# Altium PCB PCB1.PcbDoc
Units mil, origin at the board's own origin, x right, y up, seen from the top; angles counter-clockwise.
Board outline 7215 x 5000 mil, 2 copper layers (Top Layer, Bottom Layer); 106 components, 54 nets, 376 pads, 0 vias.
Unrouted connection lines stored in the file: 265.
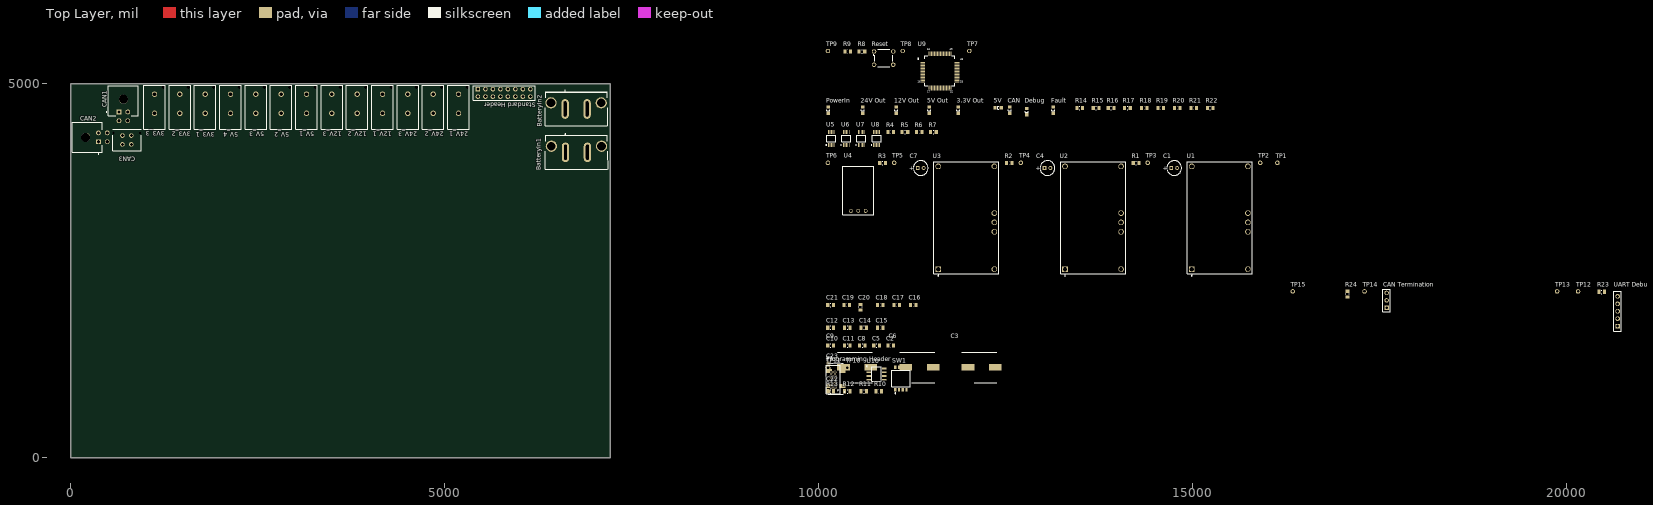
[diagram p0: Top Layer view]
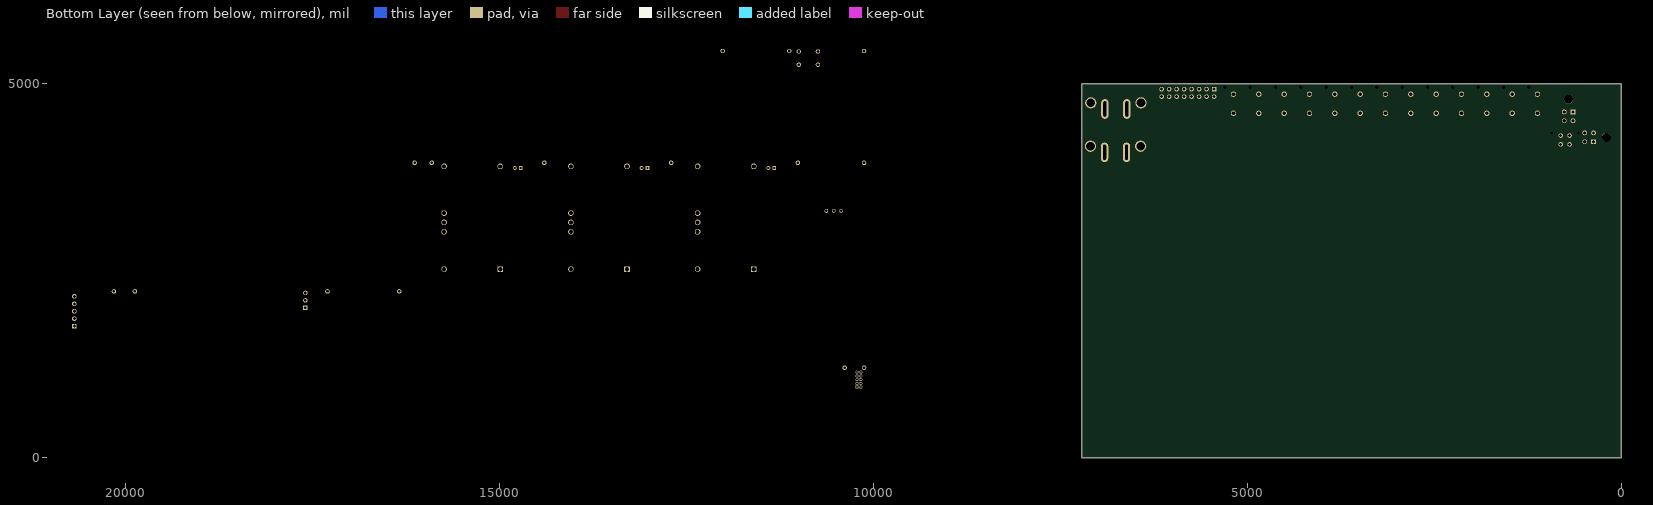
[diagram p1: Bottom Layer view, seen from below]

## Layer stack, top to bottom
Top Solder: solder mask 0.4, Solder Resist, Dk 3.5
Top Layer: signal copper 1.4
Dielectric 1: dielectric 12.6, FR-4, Dk 4.8
Bottom Layer: signal copper 1.4
Bottom Solder: solder mask 0.4, Solder Resist, Dk 3.5

## Board outline
0,0 7215,0 7215,5000 0,5000

## Design rules (kind name [scope] priority, off if disabled: settings)
Clearance [All] p1: gap=10 ignorepadtopadclearanceinfootprint=FALSE except(0: Arc-Hole Track-Hole SMDPad-Hole THPad-Hole Via-Hole Fill-Hole Poly-Hole Region-Hole Text-Hole)
PolygonConnect [All] p1: connectstyle=Relief reliefconductorwidth=10 reliefentries=4 polygonreliefangle="90 Angle" airgapwidth=10
RoutingVias [All] p1: holewidth=28 width=50 viastyle="Through Hole" minholewidth=28 minwidth=50 maxholewidth=28 maxwidth=50
SolderMaskExpansion [All] p1: expansion=4 istentingtop=FALSE
Width [All] p1: maxlimit=10 minlimit=10 preferedwidth=10
30 further rules are at their usual default settings.

## Classes and differential pairs
component class Microcontroller: C16 C17 C18 C19 C20 C21 R8 R9 Reset TP7 TP8 TP9 U9 Y1
component class LEDs: "3.3V Out" 5V "5V Out" "12V Out" "24V Out" CAN Debug Fault PowerIn R14 R15 R16 R17 R18 R19 R20 R21 R22
component class "Current Sensors": C12 C13 C14 C15 R4 R5 R6 R7 U5 U6 U7 U8
component class Converters: C1 C2 C3 C4 C5 C6 C7 C8 C9 C10 C11 R1 R2 R3 TP1 TP2 TP3 TP4 TP5 TP6 U1 U2 U3 U4
component class Connectors: 3V3_1 3V3_2 3V3_3 5V_1 5V_2 5V_3 5V_4 12V_1 12V_2 12V_3 24V_1 24V_2 24V_3 BatteryIn1 BatteryIn2 C23 CAN1 CAN2 CAN3 "CAN Termination" "Programming Header" R23 R24 "Standard Header" TP12 TP13 TP14 TP15 "UART Debug"
component class CAN: C22 R10 R11 R12 R13 SW1 TP10 TP11 U10

## Components (designator, comment, footprint, x,y, rotation, side; value= is the part's Value field where it differs from the comment)
"3.3V Out" "Yellow LED" 0805_A 11870,4650 r90 top
3V3_1 "Molex 6.5MM  power connector" "power connector" 1616.79,4374.37 r0 top
3V3_2 "Molex 6.5MM  power connector" "power connector" 1278.04,4374.37 r0 top
3V3_3 "Molex 6.5MM  power connector" "power connector" 939.29,4374.37 r0 top
5V "Yellow LED" 0805_A 12400,4680 r0 top
"5V Out" "Yellow LED" 0805_A 11480,4650 r90 top
5V_1 "Molex 6.5MM  power connector" "power connector" 2971.79,4374.37 r0 top
5V_2 "Molex 6.5MM  power connector" "power connector" 2633.04,4374.37 r0 top
5V_3 "Molex 6.5MM  power connector" "power connector" 2294.29,4374.37 r0 top
5V_4 "Molex 6.5MM  power connector" "power connector" 1955.54,4374.37 r0 top
"12V Out" "Yellow LED" 0805_A 11040,4650 r90 top
12V_1 "Molex 6.5MM  power connector" "power connector" 3988.04,4374.37 r0 top
12V_2 "Molex 6.5MM  power connector" "power connector" 3649.29,4374.37 r0 top
12V_3 "Molex 6.5MM  power connector" "power connector" 3310.54,4374.37 r0 top
"24V Out" "Yellow LED" 0805_A 10590,4650 r90 top
24V_1 "Molex 6.5MM  power connector" "power connector" 5004.29,4374.37 r0 top
24V_2 "Molex 6.5MM  power connector" "power connector" 4665.54,4374.37 r0 top
24V_3 "Molex 6.5MM  power connector" "power connector" 4326.79,4374.37 r0 top
BatteryIn1 "Super Saber" "Super Sabre" 7168.55,4284.71 r180 top
BatteryIn2 "Super Saber" "Super Sabre" 7163.55,4864.71 r180 top
C1 "ECA1HM100" CAPPR55-200-1100X500X1200 14755,3875 r0 top
C2 "Capacitor 0805" "Cap 0805" 10965,1500 r0 top
C3 "Motor Capacitor SMD" CAP_SMD_CAN 12180,1210 r0 top
C4 "ECA1HM100" CAPPR55-200-1100X500X1200 13060,3875 r0 top
C5 "Capacitor 0805" "Cap 0805" 10775,1500 r0 top
C6 "Motor Capacitor SMD" CAP_SMD_CAN 11350,1210 r0 top
C7 "ECA1HM100" CAPPR55-200-1100X500X1200 11365,3875 r0 top
C8 "Capacitor 0805" "Cap 0805" 10585,1500 r0 top
C9 "Motor Capacitor SMD" CAP_SMD_CAN 10515,1210 r0 top
C10 "Capacitor 0805" "Cap 0805" 10160,1500 r0 top
C11 "Capacitor 0805" "Cap 0805" 10385,1500 r0 top
C12 "Capacitor 0805" "Cap 0805" 10160,1740 r0 top
C13 "Capacitor 0805" "Cap 0805" 10385,1740 r0 top
C14 "Capacitor 0805" "Cap 0805" 10605,1740 r0 top
C15 "Capacitor 0805" "Cap 0805" 10825,1740 r0 top
C16 "Capacitor 0805" "Cap 0805" 11265,2045 r0 top
C17 "Capacitor 0805" "Cap 0805" 11045,2045 r0 top
C18 "Capacitor 0805" "Cap 0805" 10825,2045 r0 top
C19 "Capacitor 0805" "Cap 0805" 10375,2045 r0 top
C20 "Capacitor 0805" "Cap 0805" 10560,2015 r90 top
C21 "Capacitor 0805" "Cap 0805" 10160,2045 r0 top
C22 "Capacitor 0805" "Cap 0805" 10130,925 r90 top
C23 "Capacitor 0805" "Cap 0805" 10130,1230 r90 top
CAN "Blue LED" 0805_A 12555,4650 r90 top
CAN1 "Molex Micro" "MICROFIT R/A 4 PIN" 906.06,4980.08 r180 top
CAN2 "Molex Micro" "MICROFIT R/A 4 PIN" 14.92,4487.94 r270 top
CAN3 "Molex Micro" "microfit 4 pin" 750,4250 r180 top
"CAN Termination" "Header 3" HDR1X3 17595,2005 r90 top
Debug "Green LED" 0805_A 12785,4630 r90 top
Fault "Red LED" 0805_A 13135,4650 r90 top
PowerIn "Yellow LED" 0805_A 10130,4650 r90 top
"Programming Header" "Programming Header" programming3D 10310,850 r90 top
R1 "Resistor 0805" RESC0805(2012)_N 14245,3940 r0 top value="732 Ohm"
R2 "Resistor 0805" RESC0805(2012)_N 12550,3940 r0 top value="21 kOhm"
R3 "Resistor 0805" RESC0805(2012)_N 10855,3940 r0 top value="78.7 kOhm"
R4 "Resistor 0805" RESC0805(2012)_N 10965,4355 r0 top value="2 mOhm"
R5 "Resistor 0805" RESC0805(2012)_N 11155,4355 r0 top value="2 mOhm"
R6 "Resistor 0805" RESC0805(2012)_N 11345,4355 r0 top value="2 mOhm"
R7 "Resistor 0805" RESC0805(2012)_N 11535,4355 r0 top value="2 mOhm"
R8 "Resistor 0805" RESC0805(2012)_N 10580,5435 r0 top value="4.7 kOhm"
R9 "Resistor 0805" RESC0805(2012)_N 10390,5435 r0 top value="4.7 kOhm"
R10 "Resistor 0805" RESC0805(2012)_N 10805,890 r0 top value=120R
R11 "Resistor 0805" RESC0805(2012)_N 10605,890 r0 top value=120R
R12 "Resistor 0805" RESC0805(2012)_N 10385,890 r0 top value=120R
R13 "Resistor 0805" RESC0805(2012)_N 10160,890 r0 top value=120R
R14 "Resistor 0805" RESC0805(2012)_N 13490,4680 r0 top value="2.2 kOhm"
R15 "Resistor 0805" RESC0805(2012)_N 13710,4680 r0 top value="2.2 kOhm"
R16 "Resistor 0805" RESC0805(2012)_N 13910,4680 r0 top value="1 kOhm"
R17 "Resistor 0805" RESC0805(2012)_N 14130,4680 r0 top value="300 Ohm"
R18 "Resistor 0805" RESC0805(2012)_N 14355,4680 r0 top value="120 Ohm"
R19 "Resistor 0805" RESC0805(2012)_N 14575,4680 r0 top value="300 Ohm"
R20 "Resistor 0805" RESC0805(2012)_N 14795,4680 r0 top value="200 Ohm"
R21 "Resistor 0805" RESC0805(2012)_N 15015,4680 r0 top value="300 Ohm"
R22 "Resistor 0805" RESC0805(2012)_N 15235,4680 r0 top value="300 Ohm"
R23 "Resistor 0805" RESC0805(2012)_N 20470,2220 r0 top value=120R
R24 "Resistor 0805" RESC0805(2012)_N 17070,2190 r90 top value=120R
Reset "1825910-7" "Switch 6mm 24V (NO)" 10870,5345 r0 top
"Standard Header" "Stacking Header" SMTC-SSQ-108-02-X-D 5445,4930 r0 top
SW1 "TDA04H0SB1" CKCP-TDA04H0SB1R_V 11100,1060 r90 top
TP1 "Test Point" "Test Point Through-hole" 16115,3920 r0 top
TP2 "Test Point" "Test Point Through-hole" 15930,3925 r90 top
TP3 "Test Point" "Test Point Through-hole" 14425,3925 r90 top
TP4 "Test Point" "Test Point Through-hole" 12730,3925 r90 top
TP5 "Test Point" "Test Point Through-hole" 11035,3925 r90 top
TP6 "Test Point" "Test Point Through-hole" 10150,3925 r90 top
TP7 "Test Point" "Test Point Through-hole" 12040,5420 r90 top
TP8 "Test Point" "Test Point Through-hole" 11150,5420 r90 top
TP9 "Test Point" "Test Point Through-hole" 10150,5420 r90 top
TP10 "Test Point" "Test Point Through-hole" 10410,1185 r90 top
TP11 "Test Point" "Test Point Through-hole" 10150,1185 r90 top
TP12 "Test Point" "Test Point Through-hole" 20180,2205 r90 top
TP13 "Test Point" "Test Point Through-hole" 19900,2205 r90 top
TP14 "Test Point" "Test Point Through-hole" 17325,2205 r90 top
TP15 "Test Point" "Test Point Through-hole" 16365,2205 r90 top
U1 "PTN78020WAH" EUK0007A 15365,3210 r90 top
U2 "PTN78020WAH" EUK0007A 13670,3210 r90 top
U3 "PTN78020WAH" EUK0007A 11975,3210 r90 top
U4 "OKI-78SR-5_1.5-W36H-C" OKI-78SR-HORIZONTAL 10530,3575 r0 top
U5 "INA226AIDGST" DGS0010A_N 10170,4270 r90 top
U6 "INA226AIDGST" DGS0010A_N 10370,4270 r90 top
U7 "INA226AIDGST" DGS0010A_N 10570,4270 r90 top
U8 "INA226AIDGST" DGS0010A_N 10775,4270 r90 top
U9 "CY8C4248AZI-L485" TQFP50P1200X1200X160-64N 11620,5175 r0 top
U10 "MCP2562-E/SN" SOIC127P600X175-8N 10775,1120 r0 top
"UART Debug" "UART Debuging Header" "UART Debugging Header" 20735,1690 r90 top
Y1 "SG-636PCW_50.0000MC3__ROHS" SG-636_3D 10230,1060 r90 top

## Footprints (in the part's own frame and the unit in brackets; to place one, negate y for a bottom-side part, rotate by r counter-clockwise, add the part's x,y. Pads: shape width x height; smd on the part's side, far side on the other; paste and mask are expansions set on the pad)
0805_A [mm] "Chip LED, 2-Leads, Body 2.0x1.3mm, IPC Medium Density"
  rect 1.1x1.2 smd: 1(-1.05,0) 2(1.05,0)
  silkscreen extent -0.15,-0.5 0.15,0.5, body extent -1,-0.62 1,0.63, height 0.68
"Cap 0805" [mm]
  rect 1.05x1.4 smd: 1(-0.95,0) 2(0.95,0)
  silkscreen extent -0.05,-0.6 0.05,0.6, body extent -1.1,-0.67 1.1,0.68, height 0.7
CAP_SMD_CAN [mm]
  rect 4.3x2.1 smd: 1(-4.65,0) 2(4.65,0)
  silkscreen extent -6.8,-5.15 5.15,5.15, body extent -6.79,-5.21 5.21,5.29, height 10.5
CAPPR55-200-1100X500X1200 [mm] "THD, 2-Leads, Dia 5mm, Body Length 11mm"
  rect 1.3x1.3 hole 0.8: 1(-1,0)
  round 1.3 hole 0.8: 2(1,0)
  silkscreen extent -2.5,-2.5 2.5,2.5, body extent -2.5,-2.5 2.5,2.5, height 12
CKCP-TDA04H0SB1R_V [mm] "SMD, 8-Leads, Body 6.21x6.2mm, Pitch 1.27mm"
  rect 1.27x0.76 smd: 1(-3.81,1.905) 2(-3.81,0.635) 3(-3.81,-0.635) 4(-3.81,-1.905) 5(3.81,-1.905) 6(3.81,-0.635) 7(3.81,0.635) 8(3.81,1.905)
  silkscreen extent -5.12,-3.11 2.78,3.11, body extent -4.06,-3.1 4.06,3.11, height 2.3
DGS0010A_N [mm] "SOP, 10-Leads, Body 3.1x3.1mm, Pitch 0.5mm, IPC Medium Density"
  rrect33% 1.35x0.3 smd: 1(-2.225,1) 2(-2.225,0.5) 3(-2.225,0) 4(-2.225,-0.5) 5(-2.225,-1) 6(2.225,-1) 7(2.225,-0.5) 8(2.225,0) 9(2.225,0.5) 10(2.225,1)
  silkscreen extent -2.35,-1.55 1.15,1.87, body extent -2.45,-1.5 2.45,1.5, height 0.94
EUK0007A [mm] "Module, 7-Leads, Body 37.97x22.1mm"
  rect 1.9x1.9 hole 1.4: 1(-17.465,9.53)
  round 1.9 hole 1.4: 2(-17.465,-9.52) 3(-4.765,-9.52) 4(-1.585,-9.52) 5(1.595,-9.52) 6(17.475,-9.52) 7(17.475,9.53)
  silkscreen extent -19.81,-11.05 18.98,11.05, body extent -18.98,-11.05 18.98,11.05, height 9
HDR1X3 [mm] "Connector; Header; 3 Position"
  rect 1.5x1.5 hole 0.9: 1(0,0)
  round 1.5 hole 0.9: 2(2.54,0) 3(5.08,0)
  silkscreen extent -1.27,-1.27 6.35,1.27
"microfit 4 pin" [mil] "Molex micro-fit 3.0 4 pos"
  round 60 hole 40: 1(-59.06,59.06) 2(-59.06,-59.06) 3(59.06,59.06) 4(59.06,-59.06)
  round 0 hole 40 unplated: 7(177.17,-96.06) ""(-177.17,-96.06)
  silkscreen extent -190,-145 190,145, body extent -200,-187 200,159, height 391
"MICROFIT R/A 4 PIN" [mm]
  rect 1.605x1.605 hole 1.07: 1(6.631,9.019)
  round 1.605 hole 1.07: 2(3.631,9.019) 3(6.631,12.019) 4(3.631,12.019)
  round 3.05 hole 3.05 unplated: None(5.131,4.699)
  silkscreen extent 0.06,0.1 10.93,10.29, body extent 0.06,0.07 10.21,12.31, height 8.78
OKI-78SR-HORIZONTAL [mm]
  round 1.252 hole 0.835: 1(2.5,-6.95) 2(0,-6.95) 3(-2.5,-6.95)
  silkscreen extent -5.2,-8.25 5.2,8.25, body extent -5.21,-8.76 5.21,10.29, height 9.26
"power connector" [mm]
  round 1.85 hole 1.25: 1(4.59,5.898) 2(4.59,12.398)
  round 0 hole 1.2 unplated: 9(7.51,14.748)
  Top Layer region: 5.746,3.673
  silkscreen extent 0.92,0.5 8.26,15.5, body extent 0.91,0.5 8.25,15.5, height 16.01
programming3D [mil]
  rect 40x40 hole 28 mask+3: 1(95.28,91.77)
  round 40 hole 28 mask+3: 2(95.28,141.77) 3(145.28,91.77) 4(145.28,141.77) 5(195.28,91.77) 6(195.28,141.77) 7(245.28,91.77) 8(245.28,141.77) 9(295.28,91.77) 10(295.28,141.77)
  silkscreen extent 5,22 385,211, body extent 70,19 320,219, height 226
RESC0805(2012)_N [mm] "Chip Resistor, Body 2.0x1.3mm, IPC Medium Density"
  rect 1.05x1.4 smd: 1(-0.95,0) 2(0.95,0)
  silkscreen extent -0.05,-0.6 0.05,0.6, body extent -1.1,-0.67 1.1,0.68, height 0.7
SG-636_3D [mm]
  rect 1.3x2.1 smd: 1(-2.54,-2.3) 2(2.54,-2.3) 3(2.54,2.3) 4(-2.54,2.3)
  silkscreen extent -5.25,-3.1 5.25,2.5, body extent -5.25,-3.22 5.25,3.22, height 2.8
SMTC-SSQ-108-02-X-D [mm] "SQ Post Socket, 2x8 Pins, Vertical, 2.54mm Pitch, Female"
  rect 1.55x1.55 hole 1.02: 1(0,0)
  round 1.55 hole 1.02: 2(0,-2.54) 3(2.54,0) 4(2.54,-2.54) 5(5.08,0) 6(5.08,-2.54) 7(7.62,0) 8(7.62,-2.54) 9(10.16,0) 10(10.16,-2.54) 11(12.7,0) 12(12.7,-2.54) 13(15.24,0) 14(15.24,-2.54) 15(17.78,0) 16(17.78,-2.54)
  silkscreen extent -1.65,-3.74 19.43,1.2, body extent -1.52,-3.75 19.3,1.21, height 8.51
SOIC127P600X175-8N [mm]
  rect 1.5x0.6 smd: 1(-2.65,1.905) 2(-2.65,0.635) 3(-2.65,-0.635) 4(-2.65,-1.905) 5(2.65,-1.905) 6(2.65,-0.635) 7(2.65,0.635) 8(2.65,1.905)
  silkscreen extent -3.44,-2.45 1.58,2.81, body extent -3.12,-2.45 3.13,2.45, height 1.76
"Super Sabre" [mil]
  oval 99x263 hole 203 slot 39 at 0 deg: 1(553.55,199.71) 2(259.55,199.71)
  round 150 hole 118: ""(70.55,117.71) ""(742.55,117.71)
  silkscreen extent -9,-48 822,427, body extent -12,-105 818,422, height 586
"Switch 6mm 24V (NO)" [mm]
  round 1.498 hole 0.99: 1a(-3.25,2.25) 1b(3.25,2.25) 2a(-3.25,-2.25) 2b(3.25,-2.25)
  silkscreen extent -3.53,-3 3,3, body extent -3.9,-2.99 3.9,3, height 5.01
"Test Point Through-hole" [mil]
  round 60 hole 35: 1(20,25)
TQFP50P1200X1200X160-64N [mm]
  rect 1.65x0.3 smd mask+0: 1(-5.801,3.75) 2(-5.801,3.25) 3(-5.801,2.75) 4(-5.801,2.25) 5(-5.801,1.75) 6(-5.801,1.25) 7(-5.801,0.75) 8(-5.801,0.25) 9(-5.801,-0.25) 10(-5.801,-0.75) 11(-5.801,-1.25) 12(-5.801,-1.75) 13(-5.801,-2.25) 14(-5.801,-2.75) 15(-5.801,-3.25) 16(-5.801,-3.75) 33(5.801,-3.75) 34(5.801,-3.25) 35(5.801,-2.75) 36(5.801,-2.25) 37(5.801,-1.75) 38(5.801,-1.25) 39(5.801,-0.75) 40(5.801,-0.25) 41(5.801,0.25) 42(5.801,0.75) 43(5.801,1.25) 44(5.801,1.75) 45(5.801,2.25) 46(5.801,2.75) 47(5.801,3.25) 48(5.801,3.75)
  rect 0.3x1.65 smd mask+0: 17(-3.75,-5.801) 18(-3.25,-5.801) 19(-2.75,-5.801) 20(-2.25,-5.801) 21(-1.75,-5.801) 22(-1.25,-5.801) 23(-0.75,-5.801) 24(-0.25,-5.801) 25(0.25,-5.801) 26(0.75,-5.801) 27(1.25,-5.801) 28(1.75,-5.801) 29(2.25,-5.801) 30(2.75,-5.801) 31(3.25,-5.801) 32(3.75,-5.801) 49(3.75,5.801) 50(3.25,5.801) 51(2.75,5.801) 52(2.25,5.801) 53(1.75,5.801) 54(1.25,5.801) 55(0.75,5.801) 56(0.25,5.801) 57(-0.25,5.801) 58(-0.75,5.801) 59(-1.25,5.801) 60(-1.75,5.801) 61(-2.25,5.801) 62(-2.75,5.801) 63(-3.25,5.801) 64(-3.75,5.801)
  silkscreen extent -7.49,-5.05 5.05,5.05, body extent -5.12,-5.12 5.12,5.12, height 1.6
"UART Debugging Header" [mm]
  rect 1.55x1.55 hole 1.02: 1(1.778,1.27)
  round 1.55 hole 1.02: 2(4.318,1.27) 3(6.858,1.27) 4(9.398,1.27) 5(11.938,1.27)
  silkscreen extent 0.13,0.07 13.59,2.54

## Part data
"3.3V Out" 5V "5V Out" "12V Out" "24V Out" PowerIn: library part LED, "Standard 0805 LED", Color=Yellow, PackageReference=0805_A
C1 C4 C7: library part CMP-2100-03622-1, "Aluminum Electrolytic Capacitor, 10 uF, +/- 20%, 50 V, -40 to 85 degC, 2-Pin THD, RoHS, Bulk", Capacitance=10uF, Case/Package=Radial, Dielectric Material=Aluminium, Leakage Current=3uA, Manufacturer=Panasonic, Max Operating Temperature=85degC, Min Operating Temperature=-40degC, Package Description="2-Pin Radial Lead, Dia 5 mm, Height 12 mm", Package Quantity=200, Package Reference=CAPPR55-200-1100X500X1200, Ripple Current=65mA, Tolerance=20%, Voltage=50V, Datasheet URL=https://industrial.panasonic.com/cdbs/www-data/pdf/RDF0000/ABA0000C1218.pdf, Datasheet Version="Rev. 05, 10/2016", Diameter=5mm, Dissipation Factor=0.12%, Height=11mm, Height - Seated (Max)=0.472inch, Lead Diameter=0.5mm, Lead Free=LeadFree, Lead Pitch=2mm, Lead/Base Style=Straight, Length=11mm, Life (Hours)=2000Hour, Manufacturer URL=http://www.panasonic.com/, Mount=ThroughHole, Number of Pins=2, Packaging=Bulk, Radiation Hardening=No, REACH SVHC=NoSVHC, Ripple Current (AC)=65mA, RoHSCompliant=true, Termination=Radial, Voltage Rating=50V, Voltage Rating (DC)=50V
C2 C5 C8: "Standard Capacitor", Capacitance="2.2 µF", Case Size/Dimension=0805, Mounting Technology=SurfaceMount, Package Reference=0805
C3 C6 C9: "Capacitor Polarised", Arrow Part Number=EEE-FK1V331AP, Manufacturer_Name=Panasonic, Mouser Part Number=667-EEE-FK1V331AP, Arrow Price/Stock=https://www.arrow.com/en/products/eee-fk1v331ap/panasonic, Datasheet Link=https://www.arrow.com/en/products/eee-fk1v331ap/panasonic, Height=10.5mm, Manufacturer_Part_Number=EEE-FK1V331AP, Mouser Price/Stock=http://www.mouser.com/Search/ProductDetail.aspx?qs=fgLb7gR0z4waT8A8J1cE1w%3d%3d
C10: "Standard Capacitor", Capacitance="22 µF", Case Size/Dimension=0805, Mounting Technology=SurfaceMount, Package Reference=0805
C11 C17 C20: "Standard Capacitor", Capacitance="10 µF", Case Size/Dimension=0805, Mounting Technology=SurfaceMount, Package Reference=0805
C12 C13 C14 C15 C16 C18 C21 C22 C23: "Standard Capacitor", Capacitance=0.1µF, Case Size/Dimension=0805, Dielectric=X5R, Manufacturer=AVX, Package Description="2-Pin Surface Mount Device, Body 2.01 x 1.25 mm", Rated Voltage=10V, Tolerance (%)=±10%, Datasheet URL=http://datasheets.avx.com/cx5r.pdf, Datasheet Version=05/2016, Manufacturer URL=http://www.avx.com/, Mounting Technology=SurfaceMount, Package Reference=0805
C19: "Standard Capacitor", Capacitance="1 µF", Case Size/Dimension=0805, Mounting Technology=SurfaceMount, Package Reference=0805
CAN: library part LED, "Standard 0805 LED", Color=Blue, PackageReference=0805_A
CAN1 CAN2 CAN3: library part "Molex micro-fit 4-pin (Single row schematic)", "Molex micro-fit 3.0 dual row header. P/N 0430450427"
"CAN Termination": "Header, 3-Pin", LatestRevisionDate=17-Jul-2002, LatestRevisionNote="Re-released for DXP Platform.", Publisher="Altium Limited"
Debug: library part LED, "Standard 0805 LED", Color=Green, PackageReference=0805_A
Fault: library part LED, "Standard 0805 LED", Color="Super Red", Manufacturer="Wuerth Elektronik", PartNumber=150080SS75000, ComponentLink1Description="Manufacturer URL", ComponentLink1URL=http://www.we-online.com, ComponentLink2Description=Datasheet, ComponentLink2URL=http://katalog.we-online.com/led/datasheet/150080SS75000.pdf, PackageReference=0805_A
R1 R2 R3 R4 R5 R6 R7 R8 R9 R14 R15 R17 R19 R20 R21 R22: "Generic 0805 Resistor", Case-EIA=0805, Technology=SMT
R10 R11 R12 R13 R16 R18 R23 R24: "Generic 0805 Resistor", Case-EIA=0805, Case-Metric=2012, Power="0.125 W", Tolerance="5 %", Technology=SMT
Reset: library part "Switch 6mm 24V (NO)", "FSM4JAH=6MM TACT SWITCH, HIGH TEMP", Contact_Current_Rating="50 mA", Package=None, Configuration_Pole-Throw="Single Pole - Single Throw", Digi-Key_Part_Number=450-1804-ND, Digi-Key_Purchase_URL=https://www.digikey.com/product-detail/en/te-connectivity-alcoswitch-switches/1825910-7/450-1804-ND/1731414?utm_source=snapeda&utm_medium=aggregator&utm_campaign=symbol, EU_RoHS_Compliance=Compliant, MF="TE Connectivity", MP=1825910-7, SnapEDA_Link=https://www.snapeda.com/parts/1825910-7/TE%20Connectivity%20ALCOSWITCH%20Switches/view-part/?ref=snap, TE_purchase_URL=https://www.te.com/usa-en/product-1825910-7.html?te_bu=Cor&te_type=disp&te_campaign=seda_glo_cor-seda-global-disp-prtnr-fy19-seda-model-bom-cta_sma-317_1&elqCampaignId=32493
"Standard Header": "SQ Post Socket, Through-hole, Vertical, -55 to 125 degC, 2.54 mm Pitch, 16-Pin, Female, RoHS", Manufacturer=Samtec, PartNumber=SSQ-108-02-G-D, Temperature Range="-55 to 125 degC", ComponentLink1Description="Manufacturer URL", ComponentLink1URL=http://www.samtec.com, ComponentLink2Description=Datasheet, ComponentLink2URL=http://www.samtec.com/documents/webfiles/pdf/SSQ_TH.PDF, ComponentLink3Description="Package Specification", ComponentLink3URL=http://www.samtec.com/documents/webfiles/cpdf/SSQ-1XX-XX-XXX-X-XX-XXX-XX-X-MKT.pdf, DatasheetVersion=F-214, Mounting Technology=Through-hole, Orientation=Vertical, PackageDescription="Assembly, Socket Strip .025[0.64] SQ Tail", PackageReference=SSQ-108-02-X-D, PackageVersion="BD, 6/1987", Pitch="2.54 mm", RoHS=True
SW1: library part "Dip Switch Array SMD Half-Pitch", "Ultra-Miniature Surface Mount Half-Pitch DIP Switch, 25 mA, 24 V, -40 to 85 degC, 8-Pin SMD, RoHS, Tube", Case\Package=DIP, Contact Current Rating="100 mA", Max Contact Resistance="100 mohm", Max Current Rating="25 mA", Max Operating Temperature="85 degC", Max Voltage Rating (DC)="24 V", Min Operating Temperature="-40 degC", Package Quantity=70, ComponentLink1Description=Datasheet, ComponentLink1URL=http://www.ck-components.com/media/1328/tda.pdf, Contact Finish=Gold, Contact Material=Copper, Contact Plating=Gold, Current Rating="100 mA", DatasheetVersion=02/2016, Height="2.3 mm", Lead Pitch="1.27 mm", Length="6.21 mm", Mount="Surface Mount", Mounting Technology="Surface Mount", PackageDescription="8-Pin Surface Mount Device, Body 6.21 x 6.2 mm, Pitch 1.27 mm", PackageReference=TDA04H0SB1R, Packaging=Rail/Tube, Pins=4, Radiation Hardening=No, REACH SVHC="No SVHC", RoHSCompliant=true, Throw Configuration=SPST, Voltage Rating (DC)="24 V"
U1 U2 U3: library part CMP-0387-00547-2, "6 A Wide-Input Voltage Adjustable Switching Regulator, -40 to 85 degC, 7-pin Module (EUK7), Pb-Free (RoHS)", Manufacturer="Texas Instruments", ComponentLink1Description="Manufacturer URL", ComponentLink1URL=http://www.ti.com/, ComponentLink2Description=Datasheet, ComponentLink2URL=http://www.ti.com/general/docs/lit/getliterature.tsp?genericPartNumber=PTN78020W&fileType=pdf, ComponentLink3Description="Package Specification", ComponentLink3URL=http://www.ti.com/litv/pdf/mpds185, ComponentLink4Description="URL Link1", ComponentLink4URL="Samples URL:http://www.ti.com/product/ptn78020w#samples", DatasheetVersion=SLTS228C, Eco-Plan="Pb-Free (RoHS)", Iout(Max)(A)=6, Mounting Technology="Through Hole", PackageDescription="7-Pin Plastic Special Shape, Body 22.1 x 37.97 mm", PackageReference=EUK0007A, PackageVersion=4204986-2/C, PartNumber=PTN78020WAH, Regulated Outputs(#)=1, SubFamily="Non-Isolated POL", Vin(Max)(V)=36, Vin(Min)(V)=7, VO Adjustable=TRUE, Vout(Max)(V)=12.6, Vout(Min)(V)=2.5
U4: library part "Power Converter", "Switching Regulator 7-36Vin 5Vo 1.5A Non-Isolated DC-DC Converter, 5V dc Output, 1.5A", Manufacturer_Name="Murata Electronics", Manufacturer_Part_Number=OKI-78SR-5/1.5-W36H-C, Mouser Part Number=580-OKI78SR51.5W36HC, Datasheet Link=https://componentsearchengine.com/Datasheets/1/OKI-78SR-5_1.5-W36H-C.pdf
U5 U6 U7 U8: library part CMP-0704-00057-2, "High-Side Measurement, Bi-Directional Current / Power Monitor with I2C Interface, 2.7 to 5.5 V, -40 to 125 degC, 10-pin SOP (DGS10), Green (RoHS & no Sb/Br)", Quiescent Current (+/-)(Typ)(mA)=0.33, Rating=Catalog, CMRR(Min)(dB)=126, Code_JEDEC=MO-153, Common Mode Range(Max)(V)=36, Common Mode Range(Min)(V)=0, ComponentLink1Description="Manufacturer URL", ComponentLink1URL=http://www.ti.com/, ComponentLink2Description=Datasheet, ComponentLink2URL=http://www.ti.com/general/docs/lit/getliterature.tsp?genericPartNumber=INA226&fileType=pdf, ComponentLink3Description="Package Specification", ComponentLink3URL=http://www.ti.com/lit/ml/mpds035b/mpds035b.pdf, DatasheetVersion=SBOS547, Eco-Plan="Green (RoHS & no Sb/Br)", Gain(V/V)=1, Input Offset (+/-)(Max)(uV)=10, Input Offset Drift (+/-)(Max)(uV/Degrees Celsius)=0.1, Mounting Technology="Surface Mount", PackageDescription="10-Pin Plastic Small Outline, Body 3 x 3 mm, Pitch 0.5 mm", PackageReference=DGS0010A, PackageVersion="4073272/C, 02/2004", PartNumber=INA226AIDGST, Small-Signal Bandwidth(Typ)(MHz)=0.007, SubFamily="Current Shunt Monitor", Vs(Max)(V)=5.5, Vs(Min)(V)=2.7
U9: library part "PSOC MC", "64 pin psoc", Part_Number=CY8C4248AZI-L485
U10: library part "CAN Tranceiver", "Microchip MCP2562-E/SN, CAN Transceiver 1MBps 1-channel IEC 61000-4-2, 8-Pin SOIC", Package="SO-8 Microchip", Availability=Unavailable, MF=Microchip, MP=MCP2562-E/SN, Price=None, SnapEDA_Link=https://www.snapeda.com/parts/MCP2562-E/SN/Microchip/view-part/?ref=snap
Y1: library part Oscilator, "Standard Clock Oscillators", Arrow Part Number="SG-636PCW 50.0000MC3: ROHS", Manufacturer_Name="Epson Timing", Datasheet Link=http://www.mouser.com/ds/2/137/G-636PCE_en-1003252.pdf, Manufacturer_Part_Number="SG-636PCW 50.0000MC3: ROHS"

## Nets (pads, with @x,y where several pads share a name; then routed paths per layer and width w, separated by ;. In a path a pad name is that pad's centre, name@x,y a point inside that pad or via, vN(x,y) a via of type N, cw(c..) or ccw(c..) an arc to the next point about the centre after c; other vN are vias at no path point)
3V3_Alert: U5.3 U9.32
3V3_Converter_Enable: U3.3 U9.22
3V3_Converter_Out: C9.1 R4.1 R18.1 TP5.1 U3.5 U3.6 U5.10
3V3_Out: 3V3_1.2 3V3_2.2 3V3_3.2 "Standard Header.2" R4.2 U5.8 U5.9
5V_Alert: U6.3 U9.31
5V_Converter_Enable: U2.3 U9.23
5V_Converter_Out: C6.1 R5.1 R17.1 TP4.1 U2.5 U2.6 U6.10
5V_Out: 5V_1.2 5V_2.2 5V_3.2 5V_4.2 "Standard Header.1" R5.2 U6.8 U6.9
12V_Alert: U7.3 U9.30
12V_Converter_Enable: U1.3 U9.24
12V_Converter_Out: C3.1 R6.1 R16.2 TP3.1 U1.5 U1.6 U7.10
12V_Out: 12V_1.2 12V_2.2 12V_3.2 R6.2 U7.8 U7.9
24V_Alert: U8.3 U9.29
24V_Out: 24V_1.2 24V_2.2 24V_3.2 "Standard Header.5" "Standard Header.7" "Standard Header.9" "Standard Header.11" "Standard Header.13" "Standard Header.15" R7.2 U8.8 U8.9
+5: "Programming Header.1" "UART Debug.3" C11.2 C12.2 C13.2 C14.2 C15.2 C16.1 C17.1 C18.1 C20.1 C21.2 C22.1 C23.2 CAN1.2 CAN2.2 CAN3.2 R8.2 R9.1 R19.1 R20.2 R21.2 R22.2 R23.2 Reset.2a TP6.1 TP7.1 TP8.1 TP11.1 U4.3 U5.6 U6.2 U6.6 U7.6 U8.6 U9.11 U9.26 U9.50 U9.56 U10.3 U10.5 Y1.1 Y1.4
CANH: "Standard Header.3" CAN1.3 CAN2.3 CAN3.3 R24.2 TP15.1 U10.7
CANL: "CAN Termination.2" "Standard Header.4" CAN1.4 CAN2.4 CAN3.4 TP14.1 U10.6
CANRX: U9.39 U10.4
CANTX: U9.40 U10.1
Current_Sensor_SCL: R9.2 U5.5 U6.5 U7.5 U8.2 U8.5 U9.27
Current_Sensor_SDA: R8.1 U5.4 U6.4 U7.2 U7.4 U8.4 U9.28
Dip1: R10.2 U9.61
Dip2: R11.2 U9.62
Dip3: R12.2 U9.63
Dip4: R13.2 U9.64
GND: 3V3_1.1 3V3_2.1 3V3_3.1 5V.1 5V_1.1 5V_2.1 5V_3.1 5V_4.1 12V_1.1 12V_2.1 12V_3.1 24V_1.1 24V_2.1 24V_3.1 "3.3V Out.1" "5V Out.1" "12V Out.1" "24V Out.1" "Programming Header.3" "Programming Header.5" "Programming Header.9" "Standard Header.6" "Standard Header.8" "Standard Header.10" "Standard Header.12" "Standard Header.14" "Standard Header.16" "UART Debug.5" BatteryIn1.1 BatteryIn2.1 C1.2 C2.1 C3.2 C4.2 C5.1 C6.2 C7.2 C8.1 C9.2 C10.1 C11.1 C12.1 C13.1 C14.1 C15.1 C16.2 C17.2 C18.2 C19.2 C20.2 C21.1 C22.2 C23.1 CAN1.1 CAN2.1 CAN3.1 PowerIn.1 R1.2 R2.2 R3.2 Reset.1a Reset.1b SW1.1 SW1.2 SW1.3 SW1.4 TP9.1 TP10.1 U1.1 U1.7 U2.1 U2.7 U3.1 U3.7 U4.2 U5.1 U5.2 U5.7 U6.1 U6.7 U7.1 U7.7 U8.1 U8.7 U9.10 U9.17 U9.49 U9.57 U10.2 U10.8 Y1.2
"LED CAN": CAN.1 U9.41
"LED Debug": Debug.1 U9.42
"LED Fault": Fault.1 U9.43
"Net3.3V Out_2": "3.3V Out.2" R18.2
"Net5V Out_2": "5V Out.2" R17.2
Net5V_2: 5V.2 R19.2
"Net12V Out_2": "12V Out.2" R16.1
"Net24V Out_2": "24V Out.2" R15.2
NetC19_1: C19.1 U9.48
"NetCAN Termination_1": "CAN Termination.1" R24.1
NetCAN_2: CAN.2 R20.1
NetDebug_2: Debug.2 R21.1
NetFault_2: Fault.2 R22.1
NetPowerIn_2: PowerIn.2 R14.1
NetR1_1: R1.1 U1.4
NetR2_1: R2.1 U2.4
NetR3_1: R3.1 U3.4
NetR10_1: R10.1 SW1.8
NetR11_1: R11.1 SW1.7
NetR12_1: R12.1 SW1.6
NetR13_1: R13.1 SW1.5
Oscillator: U9.45 Y1.3
Power_In: BatteryIn1.2 BatteryIn2.2 C1.1 C2.2 C4.1 C5.2 C7.1 C8.2 C10.2 R7.1 R14.2 R15.1 TP1.1 TP2.1 U1.2 U2.2 U3.2 U4.1 U8.10
PRG_Clock: "Programming Header.4" TP13.1 U9.21
PRG_Data: "Programming Header.2" R23.1 TP12.1 U9.20
Reset: "Programming Header.10" Reset.2b U9.47
UARTRX: "UART Debug.2" U9.58
UARTTX: "UART Debug.1" U9.59
pads on no net: 3V3_1.9 3V3_2.9 3V3_3.9 5V_1.9 5V_2.9 5V_3.9 5V_4.9 12V_1.9 12V_2.9 12V_3.9 24V_1.9 24V_2.9 24V_3.9 "CAN Termination.3" "Programming Header.6" "Programming Header.7" "Programming Header.8" "UART Debug.4" BatteryIn1. BatteryIn2. CAN1.None CAN2.None CAN3. CAN3.7 U9.1 U9.2 U9.3 U9.4 U9.5 U9.6 U9.7 U9.8 U9.9 U9.12 U9.13 U9.14 U9.15 U9.16 U9.18 U9.19 U9.25 U9.33 U9.34 U9.35 U9.36 U9.37 U9.38 U9.44 U9.46 U9.51 U9.52 U9.53 U9.54 U9.55 U9.60

## Text inside footprints (layer, text, board x,y; h text height)
C1: Top Overlay "+" at 14601.14,3845.98 h59.06
C4: Top Overlay "+" at 12906.14,3845.98 h59.06
C7: Top Overlay "+" at 11211.14,3845.98 h59.06
U9: Top Overlay "16" at 11322.35,5016.13 h19.68; Top Overlay "17" at 11451,4881 h19.68; Top Overlay "32" at 11758,4883 h19.68; Top Overlay "33" at 11894,5015 h19.68; Top Overlay "48" at 11893,5313 h19.68; Top Overlay "49" at 11756,5447 h19.68; Top Overlay "64" at 11455,5447 h19.68